# Altium PCB Channel_Switcher.PcbDoc
Units mil, origin at the board's own origin, x right, y up, seen from the top; angles counter-clockwise.
Board outline 2565 x 1335 mil, 2 copper layers (Top Layer, Bottom Layer); 2 components, 33 nets, 140 pads, 0 vias.
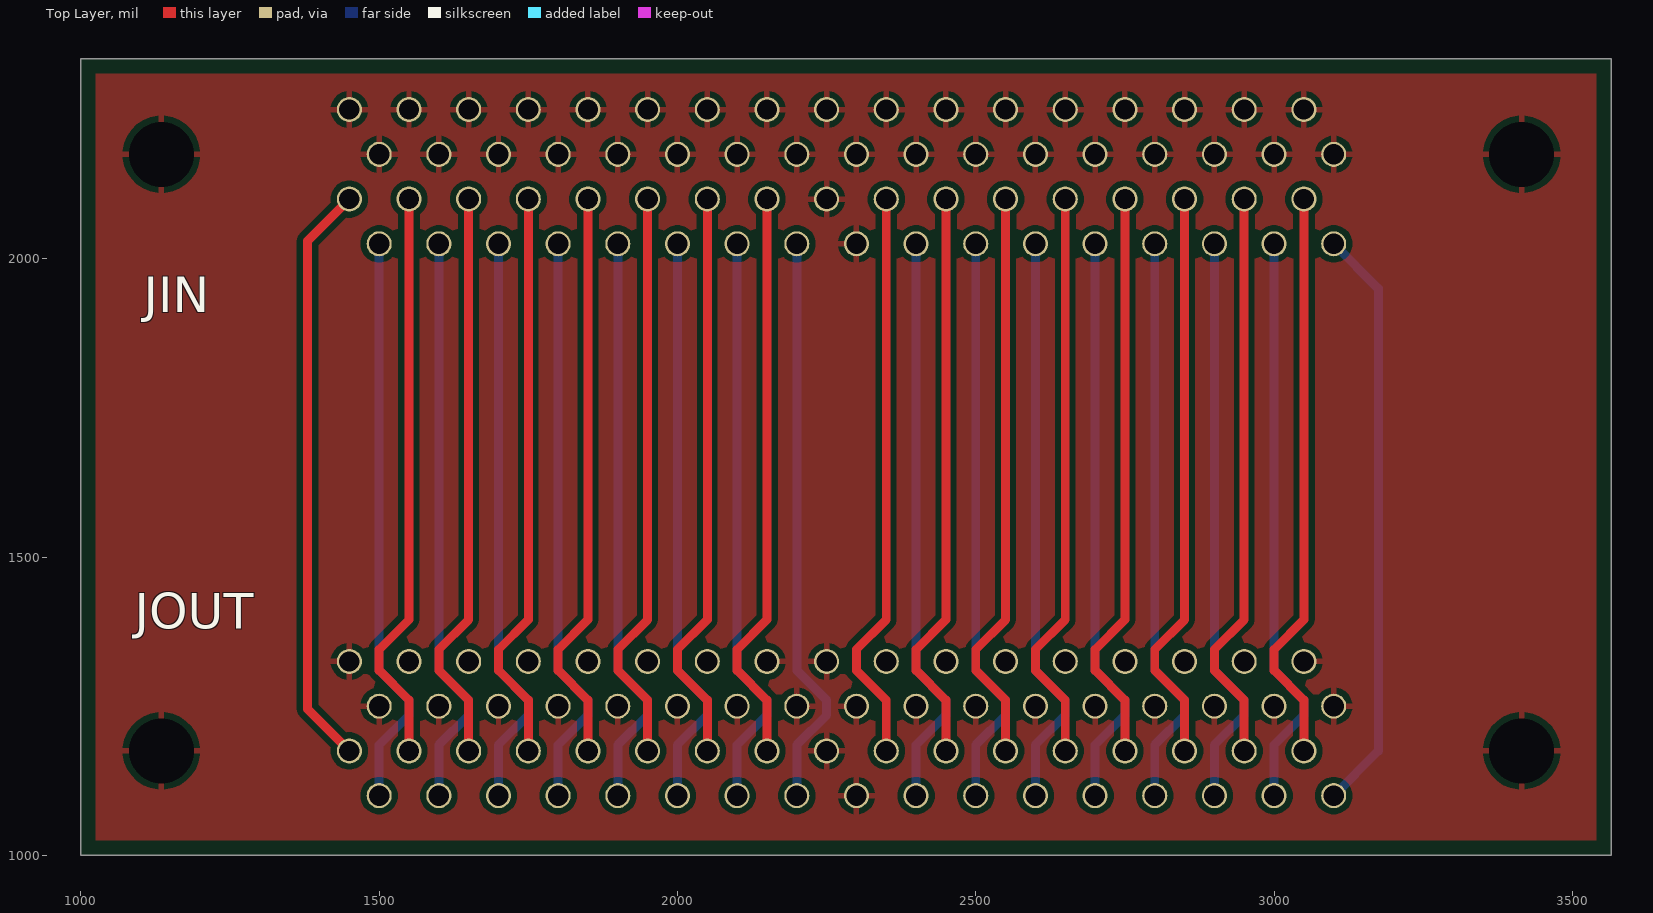
[diagram p0: Top Layer view]
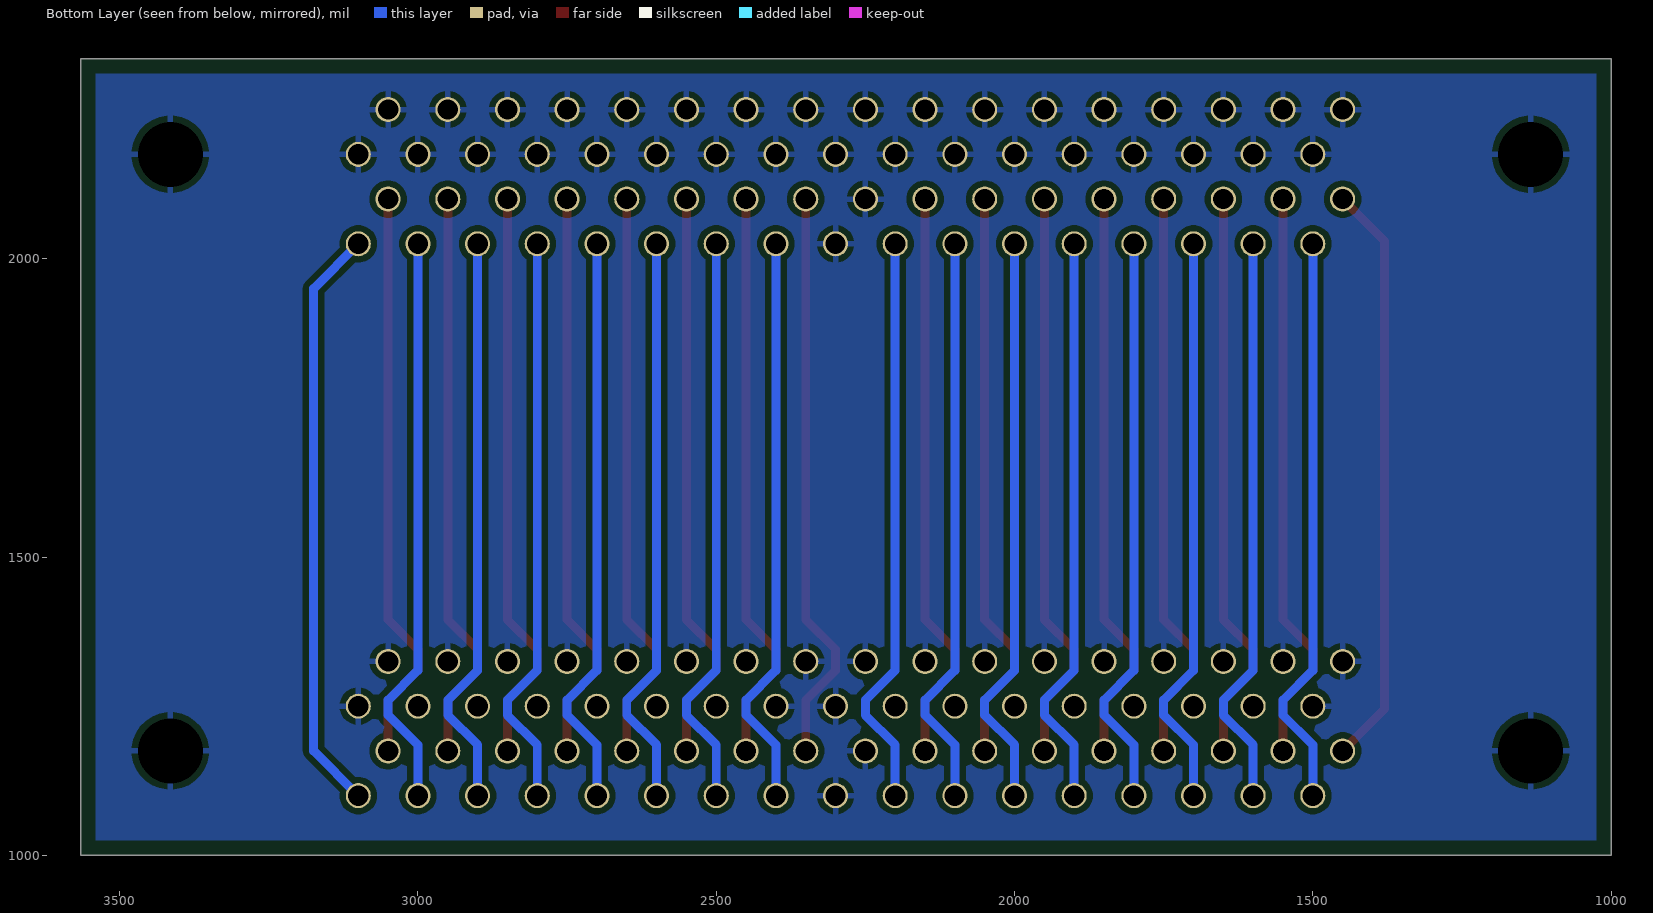
[diagram p1: Bottom Layer view, seen from below]

## Layer stack, top to bottom
Top Solder: solder mask 0.4, Solder Resist, Dk 3.5
Top Layer: signal copper 1.4
Dielectric 1: dielectric 12.6, FR-4, Dk 4.8
Bottom Layer: signal copper 1.4
Bottom Solder: solder mask 0.4, Solder Resist, Dk 3.5

## Board outline
1000,1000 3565,1000 3565,2335 1000,2335

## Design rules (kind name [scope] priority, off if disabled: settings)
Clearance [All] p1: gap=10 ignorepadtopadclearanceinfootprint=FALSE
PolygonConnect [All] p1: connectstyle=Relief reliefconductorwidth=10 reliefentries=4 polygonreliefangle="90 Angle" airgapwidth=10
RoutingVias [All] p1: holewidth=28 width=50 viastyle="Through Hole" minholewidth=28 minwidth=50 maxholewidth=28 maxwidth=50
SolderMaskExpansion [All] p1: expansion=4 istentingtop=FALSE
SupplyNets "Schematic Supply Nets" [InNet('GND')] p1: voltage=0.000
Width [All] p1: maxlimit=40 minlimit=10 preferedwidth=24
30 further rules are at their usual default settings.

## Classes and differential pairs
component class Channel_Switcher: JIN

## Components (designator, comment, footprint, x,y, rotation, side; value= is the part's Value field where it differs from the comment)
JIN "1761028-4" 1761028-4-Footprint-1 1450,2100 r180 top
JOUT "1761028-4" 1761028-4-Footprint-1 3100,1250 r0 top

## Footprints (in the part's own frame and the unit in brackets; to place one, negate y for a bottom-side part, rotate by r counter-clockwise, add the part's x,y. Pads: shape width x height; smd on the part's side, far side on the other; paste and mask are expansions set on the pad)
1761028-4-Footprint-1 [mil]
  round 42 hole 34: 1(0,0) 2(-50,75) 3(-100,0) 4(-150,75) 5(-200,0) 6(-250,75) 7(-300,0) 8(-350,75) 9(-400,0) 10(-450,75) 11(-500,0) 12(-550,75) 13(-600,0) 14(-650,75) 15(-700,0) 16(-750,75) 17(-800,0) 18(-850,75) 19(-900,0) 20(-950,75) 21(-1000,0) 22(-1050,75) 23(-1100,0) 24(-1150,75) 25(-1200,0) 26(-1250,75) 27(-1300,0) 28(-1350,75) 29(-1400,0) 30(-1450,75) 31(-1500,0) 32(-1550,75) 33(-1600,0) 34(-1650,75) 35(0,-150) 36(-50,-75) 37(-100,-150) 38(-150,-75) 39(-200,-150) 40(-250,-75) 41(-300,-150) 42(-350,-75) 43(-400,-150) 44(-450,-75) 45(-500,-150) 46(-550,-75) 47(-600,-150) 48(-650,-75) 49(-700,-150) 50(-750,-75) 51(-800,-150) 52(-850,-75) 53(-900,-150) 54(-950,-75) 55(-1000,-150) 56(-1050,-75) 57(-1100,-150) 58(-1150,-75) 59(-1200,-150) 60(-1250,-75) 61(-1300,-150) 62(-1350,-75) 63(-1400,-150) 64(-1450,-75) 65(-1500,-150) 66(-1550,-75) 67(-1600,-150) 68(-1650,-75)
  round 100 hole 109 unplated: M1(315,-75) M2(-1965,-75)

## Part data
JIN JOUT: library part CMP-002-00071-1, "Telecom and Datacom Connector, 68 Contact(s), Female, Right Angle, Solder Terminal, #2-56, Receptacle", Max Operating Temperature=105°C, Min Operating Temperature=-55°C, Connector Type="TELECOM AND DATACOM CONNECTOR", Mounting Technology=Panel,Board, RoHS Compliant=Yes

## Nets (pads, with @x,y where several pads share a name; then routed paths per layer and width w, separated by ;. In a path a pad name is that pad's centre, name@x,y a point inside that pad or via, vN(x,y) a via of type N, cw(c..) or ccw(c..) an arc to the next point about the centre after c; other vN are vias at no path point)
GND: JIN.17 JIN.18 JIN.35 JIN.36 JIN.37 JIN.38 JIN.39 JIN.40 JIN.41 JIN.42 JIN.43 JIN.44 JIN.45 JIN.46 JIN.47 JIN.48 JIN.49 JIN.50 JIN.51 JIN.52 JIN.53 JIN.54 JIN.55 JIN.56 JIN.57 JIN.58 JIN.59 JIN.60 JIN.61 JIN.62 JIN.63 JIN.64 JIN.65 JIN.66 JIN.67 JIN.68 JIN.M1 JIN.M2 JOUT.1 JOUT.2 JOUT.3 JOUT.4 JOUT.5 JOUT.6 JOUT.7 JOUT.8 JOUT.9 JOUT.10 JOUT.11 JOUT.12 JOUT.13 JOUT.14 JOUT.15 JOUT.16 JOUT.17 JOUT.18 JOUT.19 JOUT.20 JOUT.21 JOUT.22 JOUT.23 JOUT.24 JOUT.25 JOUT.26 JOUT.27 JOUT.28 JOUT.29 JOUT.30 JOUT.31 JOUT.32 JOUT.33 JOUT.34 JOUT.51 JOUT.52 JOUT.M1 JOUT.M2
NetJIN_1: JIN.1 JOUT.68 | length 983
  Top Layer w15: JOUT.68 1380,1245 1380,2030 JIN.1
NetJIN_2: JIN.2 JOUT.67 | length 966.4
  Bottom Layer w15: JOUT.67 1500,1185 1550,1235 1550,1260 1500,1310 JIN.2
NetJIN_3: JIN.3 JOUT.66 | length 966.4
  Top Layer w15: JOUT.66 1550,1260 1500,1310 1500,1345 1550,1395 JIN.3
NetJIN_4: JIN.4 JOUT.65 | length 966.4
  Bottom Layer w15: JOUT.65 1600,1185 1650,1235 1650,1260 1600,1310 JIN.4
NetJIN_5: JIN.5 JOUT.64 | length 966.4
  Top Layer w15: JOUT.64 1650,1260 1600,1310 1600,1345 1650,1395 JIN.5
NetJIN_6: JIN.6 JOUT.63 | length 966.4
  Bottom Layer w15: JOUT.63 1700,1185 1750,1235 1750,1260 1700,1310 JIN.6
NetJIN_7: JIN.7 JOUT.62 | length 966.4
  Top Layer w15: JOUT.62 1750,1260 1700,1310 1700,1345 1750,1395 JIN.7
NetJIN_8: JIN.8 JOUT.61 | length 966.4
  Bottom Layer w15: JOUT.61 1800,1185 1850,1235 1850,1260 1800,1310 JIN.8
NetJIN_9: JIN.9 JOUT.60 | length 966.4
  Top Layer w15: JOUT.60 1850,1260 1800,1310 1800,1345 1850,1395 JIN.9
NetJIN_10: JIN.10 JOUT.59 | length 966.4
  Bottom Layer w15: JOUT.59 1900,1185 1950,1235 1950,1260 1900,1310 JIN.10
NetJIN_11: JIN.11 JOUT.58 | length 966.4
  Top Layer w15: JOUT.58 1950,1260 1900,1310 1900,1345 1950,1395 JIN.11
NetJIN_12: JIN.12 JOUT.57 | length 966.4
  Bottom Layer w15: JOUT.57 2000,1185 2050,1235 2050,1260 2000,1310 JIN.12
NetJIN_13: JIN.13 JOUT.56 | length 966.4
  Top Layer w15: JOUT.56 2050,1260 2000,1310 2000,1345 2050,1395 JIN.13
NetJIN_14: JIN.14 JOUT.55 | length 966.4
  Bottom Layer w15: JOUT.55 2100,1185 2150,1235 2150,1260 2100,1310 JIN.14
NetJIN_15: JIN.15 JOUT.54 | length 966.4
  Top Layer w15: JOUT.54 2150,1260 2100,1310 2100,1345 2150,1395 JIN.15
NetJIN_16: JIN.16 JOUT.53 | length 966.4
  Bottom Layer w15: JOUT.53 2200,1185 2250,1235 2250,1260 2200,1310 JIN.16
NetJIN_19: JIN.19 JOUT.50 | length 966.4
  Top Layer w15: JOUT.50 2350,1260 2300,1310 2300,1345 2350,1395 JIN.19
NetJIN_20: JIN.20 JOUT.49 | length 966.4
  Bottom Layer w15: JOUT.49 2400,1185 2450,1235 2450,1260 2400,1310 JIN.20
NetJIN_21: JIN.21 JOUT.48 | length 966.4
  Top Layer w15: JOUT.48 2450,1260 2400,1310 2400,1345 2450,1395 JIN.21
NetJIN_22: JIN.22 JOUT.47 | length 966.4
  Bottom Layer w15: JOUT.47 2500,1185 2550,1235 2550,1260 2500,1310 JIN.22
NetJIN_23: JIN.23 JOUT.46 | length 966.4
  Top Layer w15: JOUT.46 2550,1260 2500,1310 2500,1345 2550,1395 JIN.23
NetJIN_24: JIN.24 JOUT.45 | length 966.4
  Bottom Layer w15: JOUT.45 2600,1185 2650,1235 2650,1260 2600,1310 JIN.24
NetJIN_25: JIN.25 JOUT.44 | length 966.4
  Top Layer w15: JOUT.44 2650,1260 2600,1310 2600,1345 2650,1395 JIN.25
NetJIN_26: JIN.26 JOUT.43 | length 966.4
  Bottom Layer w15: JOUT.43 2700,1185 2750,1235 2750,1260 2700,1310 JIN.26
NetJIN_27: JIN.27 JOUT.42 | length 966.4
  Top Layer w15: JOUT.42 2750,1260 2700,1310 2700,1345 2750,1395 JIN.27
NetJIN_28: JIN.28 JOUT.41 | length 966.4
  Bottom Layer w15: JOUT.41 2800,1185 2850,1235 2850,1260 2800,1310 JIN.28
NetJIN_29: JIN.29 JOUT.40 | length 966.4
  Top Layer w15: JOUT.40 2850,1260 2800,1310 2800,1345 2850,1395 JIN.29
NetJIN_30: JIN.30 JOUT.39 | length 966.4
  Bottom Layer w15: JOUT.39 2900,1185 2950,1235 2950,1260 2900,1310 JIN.30
NetJIN_31: JIN.31 JOUT.38 | length 966.4
  Top Layer w15: JOUT.38 2950,1260 2900,1310 2900,1345 2950,1395 JIN.31
NetJIN_32: JIN.32 JOUT.37 | length 966.4
  Bottom Layer w15: JOUT.37 3000,1185 3050,1235 3050,1260 3000,1310 JIN.32
NetJIN_33: JIN.33 JOUT.36 | length 966.4
  Top Layer w15: JOUT.36 3050,1260 3000,1310 3000,1345 3050,1395 JIN.33
NetJIN_34: JIN.34 JOUT.35 | length 987.1
  Bottom Layer w15: JOUT.35 3175,1175 3175,1950 JIN.34

## Polygon pours and split planes (outlines as drawn)
GND on Bottom Layer "GND_L02_P000" (solid, pour order 0): 1025,1025 3540,1025 3540,2310 1025,2310
GND on Top Layer "GND_L01_P001" (solid, pour order 1): 1025,1025 3540,1025 3540,2310 1025,2310